# Altium PCB PCB1.PcbDoc (part 2 of 3)
Units mm, origin at the board's own origin, x right, y up, seen from the top; angles counter-clockwise.
Board outline 100.25 x 100.25 mm, 2 copper layers (Top Layer, Bottom Layer); 97 components, 80 nets, 311 pads, 309 vias.
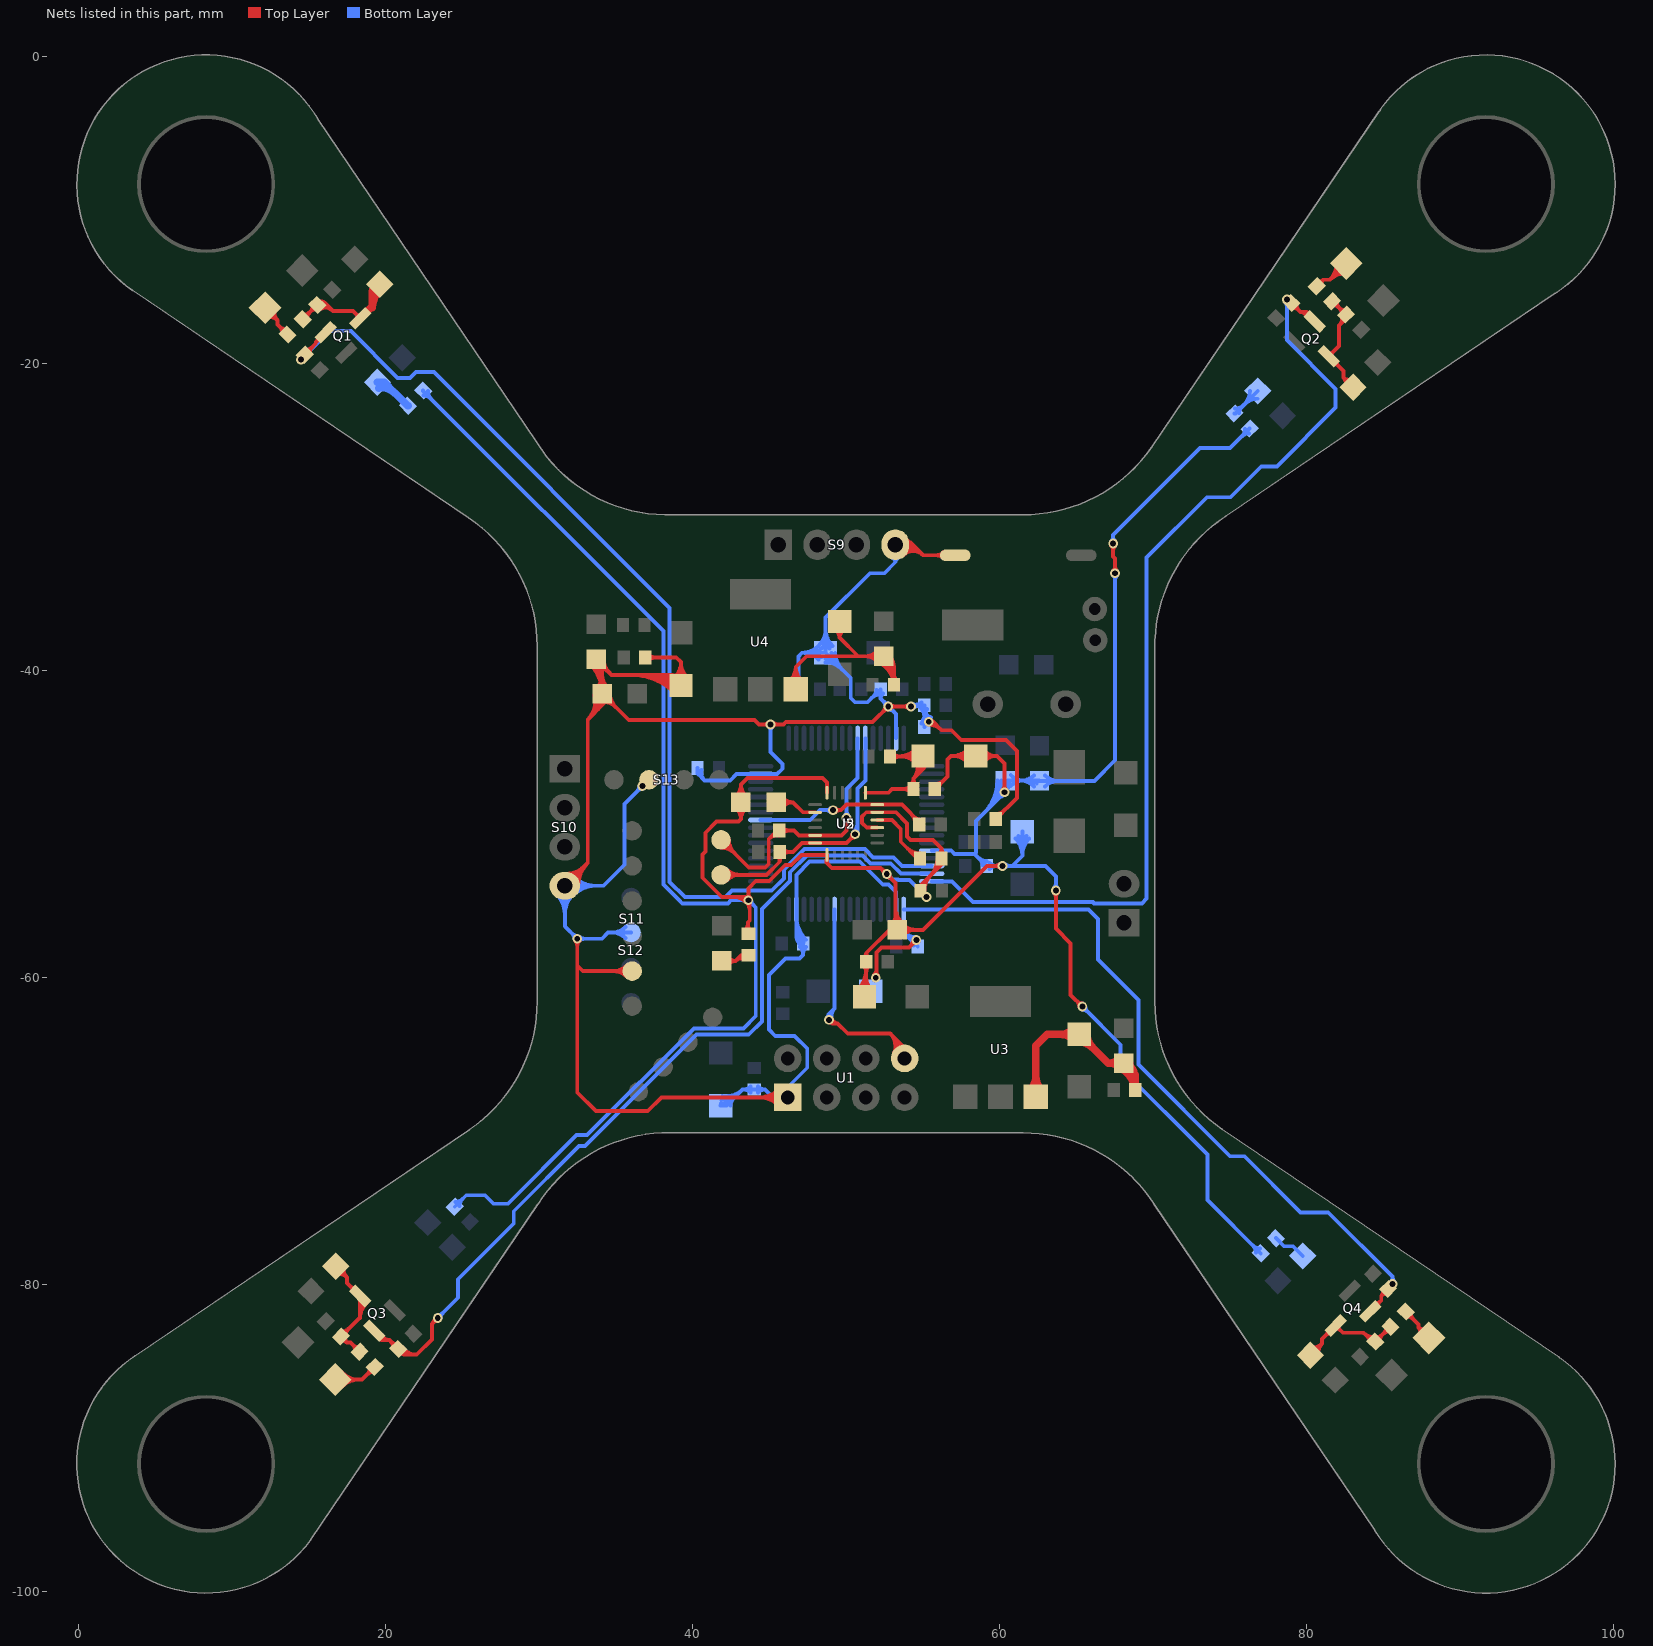
[diagram p2: the nets of this part, all layers, seen from the top]

## Via types
v1: diameter 0.635, hole 0.381, Top Layer to Bottom Layer, 309 vias

## Nets (pads, with @x,y where several pads share a name; then routed paths per layer and width w, separated by ;. In a path a pad name is that pad's centre, name@x,y a point inside that pad or via, vN(x,y) a via of type N, cw(c..) or ccw(c..) an arc to the next point about the centre after c; other vN are vias at no path point) (continued)
GNDA: C6.2 C7.1 C8.2 C9.2 C11.2 C18.1 C20.1 C21.1 EC2.2 EC4.2 EC9.2 L2.2 R1.2 R2.2 R3.2 R4.2 R5.2 U2.1 U2.9 U2.11 U2.18 U5.12 | length 302.8
  Top Layer w0.254: 42.687,-54.762 cw(c42.687,-55.916) 43.502,-55.1 cw(c42.963,-55.64) 43.726,-55.64 ; C8.2@42.808,-48.219 ccw(c42.065,-47.422) 43.155,-47.422 ; C8.2@42.827,-48.979 cw(c42.235,-49.682) 43.155,-49.682 ; 43.3,-54.762 cw(c43.3,-55.303) v1@43.682,-54.921 ; R1.2@43.394,-56.968 ccw(c42.869,-56.443) 43.612,-56.443 ; C8.2@43.482,-48.979 ccw(c44.075,-49.682) 43.155,-49.682 ; C8.2@43.501,-48.219 cw(c44.244,-47.422) 43.155,-47.422 ; v1@43.502,-54.831 ccw(c43.177,-54.506) 43.637,-54.506 ccw(c44.097,-54.506) v1@43.772,-54.831 ; 43.612,-56.562 ccw(c44.187,-56.562) R1.2@43.78,-56.968 ; R1.2@43.637,-57.161 43.612,-57.136 43.612,-56.413 43.726,-56.299 43.726,-55.054 v1(43.637,-54.966) ; U2.1@48.736,-52.362 ccw(c49.117,-52.362) 48.847,-52.632 ; U2.1@48.74,-52.348 ccw(c48.877,-52.433) 48.763,-52.547 ; U2.18@48.763,-47.962 48.763,-47.289 48.463,-46.99 43.586,-46.99 43.155,-47.422 ; EC4.2@50.757,-60.816 ccw(c49.401,-59.459) 51.319,-59.459 ; EC4.2@50.937,-60.995 ccw(c50.014,-60.073) 51.319,-60.073 ; C11.2@51.126,-59.222 cw(c50.66,-59.688) 51.319,-59.688 cw(c51.978,-59.688) C11.2@51.512,-59.222 ; C11.2@51.164,-58.704 ccw(c50.961,-58.409) 51.319,-58.409 ; EC4.2@51.206,-61.265 51.319,-61.152 C11.2@51.319,-58.979 51.319,-58.409 ; 51.319,-60.004 ccw(c52.467,-60.004) EC4.2@51.655,-60.816 ; C11.2@51.474,-58.704 cw(c51.678,-58.409) 51.319,-58.409 ; U2.9@52.038,-50.237 51.355,-50.237 51.054,-49.936 51.054,-49.505 51.321,-49.237 U2.11@52.038,-49.237 53.25,-49.237 53.975,-49.962 53.975,-50.825 54.204,-51.054 55.677,-51.054 56.224,-51.602 ; v1@52.464,-53.264 ccw(c52.004,-53.264) 52.329,-52.939 ccw(c52.654,-52.613) v1@52.654,-53.073 ; v1@52.654,-53.454 cw(c52.654,-53.914) 52.979,-53.589 cw(c53.305,-53.264) v1@52.845,-53.264 ; L2.2@52.981,-56.537 ccw(c52.393,-55.949) 53.224,-55.949 ; 53.224,-56.003 ccw(c54.233,-56.003) L2.2@53.52,-56.716 ; 53.224,-55.39 ccw(c54.846,-55.39) 53.699,-56.537 ccw(c54.566,-55.67) 54.566,-56.896 ccw(c54.566,-58.122) L2.2@53.699,-57.255 ; C6.2@54.85,-54.356 54.85,-54.015 56.224,-52.64 C9.2@56.224,-52.248 56.224,-51.602 ; C6.2@54.869,-54.306 cw(c55.618,-54.306) 55.088,-53.776 ; C6.2@55.123,-54.306 cw(c56.485,-54.306) 55.522,-53.343 ; 55.516,-53.348 ccw(c54.466,-52.298) C9.2@55.951,-52.298 ; C7.1@55.793,-47.727 56.617,-46.903 56.617,-45.796 56.845,-45.568 EC2.2@58.445,-45.568 59.842,-45.568 ; C7.1@55.793,-47.404 ccw(c55.793,-46.624) 56.344,-47.175 ; 55.95,-52.914 ccw(c55.333,-52.298) C9.2@56.205,-52.298 ; C9.2@56.046,-51.991 ccw(c55.71,-51.602) 56.224,-51.602 ; C7.1@56.066,-47.677 cw(c56.604,-47.677) 56.223,-47.296 ; C9.2@56.403,-51.991 cw(c56.739,-51.602) 56.224,-51.602 ; EC2.2@57.996,-46.017 ccw(c56.912,-47.101) 56.912,-45.568 ccw(c56.912,-44.035) EC2.2@57.996,-45.119 ; EC2.2@58.176,-45.837 ccw(c57.526,-46.487) 57.526,-45.568 ccw(c57.526,-44.648) EC2.2@58.176,-45.298 ; EC2.2@58.732,-45.818 cw(c59.284,-46.299) 59.284,-45.568 cw(c59.284,-44.836) EC2.2@58.732,-45.317 ; EC2.2@58.924,-45.985 cw(c59.842,-46.787) 59.842,-45.568 ; EC2.2@58.924,-45.15 ccw(c59.842,-44.349) 59.842,-45.568 ; v1@60.063,-52.865 ccw(c59.738,-53.19) 59.738,-52.73 ccw(c59.738,-52.27) v1@60.063,-52.596 ; v1@60.19,-47.795 ccw(c59.865,-47.47) 60.325,-47.47 ccw(c60.785,-47.47) v1@60.46,-47.795 ; v1(60.198,-52.73) 59.182,-52.73 55.016,-56.896 L2.2@53.34,-56.896 L2.2@53.224,-56.896 ; v1(60.325,-47.93) 60.325,-46.05 59.842,-45.568 ; v1@63.543,-54.465 cw(c63.218,-54.791) 63.678,-54.791 cw(c64.138,-54.791) v1@63.813,-54.465 ; v1(63.678,-54.331) 63.678,-56.82 64.643,-57.785 64.643,-61.138 v1(65.405,-61.9) ; v1@65.215,-61.9 ccw(c64.755,-61.9) 65.08,-61.575 ccw(c65.405,-61.249) v1@65.405,-61.709 ; v1@67.277,-31.859 cw(c66.952,-32.185) 67.412,-32.185 cw(c67.872,-32.185) v1@67.546,-31.859 ; v1@67.404,-33.52 ccw(c67.079,-33.195) 67.539,-33.195 ccw(c67.999,-33.195) v1@67.673,-33.52 ; v1(67.412,-31.725) 67.412,-32.563 67.539,-32.69 v1(67.539,-33.655) ; 43.155,-49.682 42.989,-49.847 41.567,-49.847 40.843,-50.571 40.843,-51.791 40.64,-51.994 40.64,-53.502 41.901,-54.762 43.434,-54.762 v1(43.637,-54.966) ; 43.155,-49.682 C8.2@43.155,-48.59 43.155,-47.422 ; v1(43.637,-54.966) 43.637,-54.204 44.12,-53.721 44.999,-53.721 46.041,-52.68 46.431,-52.68 47.099,-52.012 U2.1@48.763,-52.012 48.763,-52.547 ; 48.763,-52.547 49.073,-52.857 52.248,-52.857 v1(52.654,-53.264) 53.224,-53.834 L2.2@53.224,-56.896 ; 51.319,-58.409 52.832,-56.896 L2.2@53.224,-56.896
  Bottom Layer w0.254: R2.2@22.441,-21.755 22.441,-21.773 38.1,-37.433 38.1,-53.95 39.116,-54.966 39.125,-54.966 39.329,-55.169 42.307,-55.169 42.51,-54.966 v1(43.637,-54.966) 44.12,-55.448 44.12,-62.509 43.307,-63.322 40.091,-63.322 33.131,-70.282 32.436,-70.282 27.965,-74.752 27.026,-74.752 26.467,-74.193 25.249,-74.193 R5.2@24.499,-74.943 ; R2.2@22.476,-22.064 cw(c22.476,-22.679) 22.911,-22.244 ; R2.2@22.749,-21.791 ccw(c23.452,-21.791) 22.955,-22.288 ; R5.2@24.535,-74.634 ccw(c24.535,-73.975) 25.001,-74.441 ccw(c25.467,-74.907) R5.2@24.808,-74.907 ; v1@43.502,-55.1 ccw(c43.177,-55.426) 43.177,-54.966 ccw(c43.177,-54.506) v1@43.502,-54.831 ; v1@43.637,-55.156 cw(c43.637,-55.616) 43.962,-55.291 cw(c44.288,-54.966) v1@43.828,-54.966 ; v1@52.654,-53.454 cw(c52.654,-53.953) 53.007,-53.6 ; v1(52.654,-53.264) 52.67,-53.264 53.026,-53.619 53.384,-53.619 53.409,-53.644 54.126,-53.644 v1(55.245,-54.762) ; v1@52.845,-53.264 ccw(c53.266,-53.264) 52.968,-53.562 ; v1@55.054,-54.762 ccw(c54.595,-54.762) 54.92,-54.437 ccw(c55.245,-54.112) v1@55.245,-54.572 ; U5.12@55.588,-51.737 56.859,-51.737 57.064,-51.943 58.383,-51.943 ; 58.619,-52.179 ccw(c59.171,-51.628) C18.1@59.171,-52.407 ; 58.74,-52.3 cw(c58.359,-52.68) C18.1@58.898,-52.68 ; 58.988,-49.292 ccw(c56.863,-47.168) C20.1@59.868,-47.168 ; C18.1@59.364,-52.923 cw(c59.83,-53.389) 59.83,-52.73 cw(c59.83,-52.071) C18.1@59.364,-52.537 ; 59.421,-48.859 ccw(c57.73,-47.168) C20.1@60.122,-47.168 ; 59.786,-48.314 cw(c60.538,-48.668) v1@60.307,-47.869 ; 59.847,-48.437 cw(c60.487,-48.892) v1@60.357,-48.118 ; 59.855,-48.425 ccw(c58.597,-47.168) C20.1@60.376,-47.168 ; 59.982,-48.298 ccw(c59.613,-47.93) v1@60.134,-47.93 ; 60.025,-47.805 cw(c60.331,-47.949) C20.1@60.237,-47.625 ; 60.043,-48.237 cw(c60.325,-48.519) v1@60.325,-48.12 ; v1@60.063,-52.865 ccw(c59.738,-53.19) 59.738,-52.73 ccw(c59.738,-52.27) v1@60.063,-52.596 ; C20.1@60.19,-47.795 ccw(c59.742,-47.347) C20.1@60.376,-47.347 ; C20.1@60.195,-47.643 cw(c60.096,-47.904) v1@60.376,-47.904 ; C20.1@60.276,-47.746 ccw(c60.157,-47.304) C20.1@60.554,-47.533 ; v1@60.289,-47.992 ccw(c59.465,-47.168) C20.1@60.63,-47.168 ; C20.1@60.32,-47.411 ccw(c60.683,-47.495) C20.1@60.446,-47.783 ; v1@60.333,-52.865 cw(c60.658,-53.19) 60.658,-52.73 cw(c60.658,-52.27) v1@60.333,-52.596 ; C20.1@60.376,-47.593 ccw(c60.662,-47.593) C20.1@60.46,-47.795 ; v1@60.509,-47.88 cw(c60.955,-47.761) C20.1@60.555,-47.53 ; C20.1@60.556,-47.643 ccw(c60.656,-47.904) v1@60.376,-47.904 ; C20.1@60.735,-47.527 cw(c61.602,-48.394) 61.602,-47.168 cw(c61.602,-45.941) C20.1@60.735,-46.809 ; EC9.2@61.044,-50.944 cw(c59.96,-52.028) 61.493,-52.028 cw(c63.026,-52.028) EC9.2@61.942,-50.944 ; EC9.2@61.224,-50.765 cw(c60.574,-51.415) 61.493,-51.415 cw(c62.413,-51.415) EC9.2@61.763,-50.765 ; 61.323,-47.168 cw(c61.323,-48.481) C21.1@62.252,-47.552 ; 61.446,-47.168 ccw(c61.446,-46.028) C21.1@62.252,-46.834 ; EC9.2@61.493,-50.495 61.493,-52.07 60.833,-52.73 ; 61.936,-47.168 cw(c61.936,-47.868) C21.1@62.431,-47.373 ; C21.1@62.97,-47.552 cw(c63.837,-48.42) 63.837,-47.193 cw(c63.837,-45.967) C21.1@62.97,-46.834 ; v1@63.543,-54.196 ccw(c63.218,-53.871) 63.678,-53.871 ccw(c64.138,-53.871) v1@63.813,-54.196 ; v1(63.678,-54.331) 63.678,-53.416 62.992,-52.73 60.833,-52.73 ; v1@65.405,-62.09 cw(c65.405,-62.55) 65.73,-62.225 cw(c66.055,-61.9) v1@65.596,-61.9 ; v1(65.405,-61.9) 67.894,-64.389 67.894,-65.888 73.558,-71.552 73.558,-74.511 R4.2@77.029,-77.982 ; v1@67.277,-31.59 ccw(c66.952,-31.265) 67.412,-31.265 ccw(c67.872,-31.265) v1@67.546,-31.59 ; v1@67.404,-33.79 cw(c67.079,-34.115) 67.539,-34.115 cw(c67.999,-34.115) v1@67.673,-33.79 ; v1(67.412,-31.725) 67.412,-31.166 73.076,-25.502 75.035,-25.502 R3.2@76.308,-24.229 ; v1(67.539,-33.655) 67.539,-45.847 66.192,-47.193 C21.1@62.611,-47.193 62.586,-47.168 C20.1@60.376,-47.168 ; R3.2@75.999,-24.264 cw(c75.34,-24.264) 75.806,-24.73 cw(c76.272,-25.196) R3.2@76.272,-24.537 ; R4.2@76.721,-77.946 ccw(c76.062,-77.946) 76.528,-77.48 ccw(c76.994,-77.014) R4.2@76.994,-77.673 ; 58.383,-51.943 C18.1@59.171,-52.73 60.833,-52.73 ; 58.383,-51.943 58.466,-51.86 58.466,-49.814 v1@60.376,-47.904 ; v1@60.376,-47.904 C20.1@60.376,-47.168
GNDD: C1.1 C13.2 C14.1 C15.1 C16.1 C17.1 C19.1 C22.2 EC1.2 EC6.2 EC7.2 EC8.2 L4.2 LED6.2 R20.2 R23.1 S9.4 S10.4 S11.5 S12.3 S13.3 SW1.2 U1.1 U5.18 U5.31 U5.47 U5.63 | length 297.4
  Top Layer w0.254: S10.4@31.674,-54.026 33.172,-52.527 33.172,-43.18 ; S10.4@31.774,-53.507 ccw(c31.774,-52.495) 32.489,-53.211 ; S10.4@31.774,-53.253 ccw(c31.774,-51.628) 32.923,-52.777 ; S10.4@32.293,-54.026 cw(c33.787,-54.026) 32.73,-52.969 ; v1@32.352,-57.615 cw(c32.027,-57.94) 32.487,-57.94 cw(c32.947,-57.94) v1@32.621,-57.615 ; v1(32.487,-57.48) 32.487,-59.233 ; S10.4@32.547,-54.026 cw(c34.654,-54.026) 33.164,-52.535 ; LED6.2@33.349,-39.628 cw(c31.5,-41.476) L4.2@34.114,-41.476 ; 33.496,-42.856 ccw(c32.515,-41.875) L4.2@33.867,-41.561 ; LED6.2@33.528,-39.448 cw(c32.113,-40.863) 34.114,-40.863 ; L4.2@33.619,-41.619 cw(c31.989,-41.997) 33.172,-43.18 ; LED6.2@33.708,-39.777 cw(c33.708,-41.003) 34.575,-40.136 cw(c35.442,-39.269) LED6.2@34.216,-39.269 ; LED6.2@33.708,-39.269 cw(c32.727,-40.25) 34.114,-40.25 ; L4.2@33.755,-41.145 ccw(c32.888,-40.277) 34.114,-40.277 ccw(c35.341,-40.277) L4.2@34.473,-41.145 ; 33.82,-42.533 ccw(c33.04,-41.753) L4.2@34.114,-41.504 ; L4.2@33.935,-41.979 cw(c33.837,-42.238) 34.114,-42.238 ; L4.2@34.114,-42.012 cw(c34.114,-43.238) 34.981,-42.371 cw(c35.849,-41.504) L4.2@34.622,-41.504 ; 34.143,-42.209 ccw(c33.565,-41.631) L4.2@34.362,-41.446 ; L4.2@34.293,-41.979 ccw(c34.391,-42.238) 34.114,-42.238 ; S11.5@35.709,-59.948 ccw(c34.842,-60.815) 34.842,-59.588 ccw(c34.842,-58.362) S11.5@35.709,-59.229 ; 36.056,-40.284 cw(c36.056,-44.16) EC6.2@38.796,-41.419 ; S11.5@36.068,-59.588 32.842,-59.588 32.487,-59.233 ; 36.669,-40.284 cw(c36.669,-43.546) EC6.2@38.976,-41.24 ; C13.2@36.922,-39.142 38.938,-39.142 39.245,-39.448 ; C13.2@37.115,-39.335 cw(c37.581,-39.801) 37.581,-39.142 cw(c37.581,-38.483) C13.2@37.115,-38.949 ; 37.282,-40.284 cw(c37.282,-42.933) EC6.2@39.155,-41.06 ; 37.895,-40.284 cw(c37.895,-42.32) EC6.2@39.335,-40.881 ; EC6.2@38.509,-40.284 cw(c38.509,-41.707) EC6.2@39.514,-40.701 ; EC6.2@38.798,-40.519 ccw(c37.738,-39.448) 39.245,-39.448 ; EC6.2@38.977,-40.7 ccw(c38.341,-40.057) 39.245,-40.057 ccw(c40.149,-40.057) EC6.2@39.513,-40.7 ; EC6.2@39.692,-40.519 cw(c40.752,-39.448) 39.245,-39.448 ; v1@44.95,-43.645 ccw(c44.625,-43.97) 44.625,-43.51 ccw(c44.625,-43.05) v1@44.95,-43.375 ; v1@45.22,-43.645 cw(c45.545,-43.97) 45.545,-43.51 cw(c45.545,-43.05) v1@45.22,-43.375 ; U1.1@45.656,-68.365 ccw(c44.336,-69.684) 44.336,-67.818 ccw(c44.336,-65.952) U1.1@45.656,-67.271 ; U1.1@45.836,-68.185 ccw(c44.95,-69.071) 44.95,-67.818 ccw(c44.95,-66.565) U1.1@45.836,-67.451 ; U1.1@46.203,-67.818 37.973,-67.818 37.08,-68.711 33.71,-68.711 32.487,-67.488 32.487,-59.233 ; v1@51.808,-59.885 ccw(c51.349,-59.426) 51.999,-59.426 ; v1(51.943,-60.02) 51.999,-59.965 51.999,-58.364 52.324,-58.039 54.102,-58.039 v1(54.585,-57.556) ; 51.999,-59.695 ccw(c52.269,-59.695) v1@52.078,-59.885 ; v1@52.565,-42.342 cw(c52.105,-42.342) 52.431,-42.667 cw(c52.756,-42.992) v1@52.756,-42.532 ; v1@52.891,-42.477 cw(c53.216,-42.802) 53.216,-42.342 cw(c53.216,-41.882) v1@52.891,-42.207 ; S9.4@53.047,-31.723 cw(c53.662,-32.381) 54.299,-31.744 ; S9.4@53.213,-31.648 54.204,-31.648 ; S9.4@53.221,-31.909 cw(c53.842,-32.573) 54.485,-31.93 ; S9.4@53.394,-32.094 cw(c54.021,-32.764) 54.671,-32.115 ; S9.4@53.568,-32.28 cw(c54.201,-32.956) 54.856,-32.301 ; S9.4@53.741,-32.465 cw(c54.38,-33.148) 55.042,-32.487 ; S9.4@53.948,-31.463 ccw(c54.204,-31.38) 54.204,-31.648 ; S9.4@53.973,-31.84 cw(c54.204,-31.882) 54.204,-31.648 ; v1@54.094,-42.477 ccw(c53.769,-42.802) 53.769,-42.342 ccw(c53.769,-41.882) v1@54.094,-42.207 ; v1(54.229,-42.342) v1(52.756,-42.342) 51.74,-43.358 46.076,-43.358 45.923,-43.51 v1(45.085,-43.51) 44.323,-43.51 44.044,-43.231 35.841,-43.231 L4.2@34.114,-41.504 ; v1@54.394,-57.556 cw(c53.934,-57.556) 54.259,-57.882 cw(c54.585,-58.207) v1@54.585,-57.747 ; v1@55.397,-43.523 cw(c55.397,-44.657) 56.2,-43.855 ; v1(55.397,-43.332) 55.677,-43.332 56.232,-43.887 56.871,-43.887 57.51,-44.526 60.427,-44.526 61.138,-45.237 61.138,-48.3 C22.2@59.755,-49.682 ; v1@55.397,-43.269 cw(c55.397,-43.79) 55.766,-43.422 ; SW1.2@56.324,-32.662 ccw(c55.901,-33.085) 55.901,-32.487 ccw(c55.901,-31.888) SW1.2@56.324,-32.311 ; SW1.2@57.125,-32.487 55.042,-32.487 ; C22.2@59.755,-49.359 ccw(c59.755,-48.58) 60.306,-49.131 ; C22.2@60.028,-49.632 cw(c60.566,-49.632) 60.186,-49.252 ; 33.172,-43.18 34.114,-42.238 ; 34.114,-42.238 L4.2@34.114,-41.504 ; L4.2@34.114,-41.504 34.114,-39.675 34.724,-40.284 38.559,-40.284 EC6.2@39.245,-40.97 39.245,-39.448 ; 54.204,-31.648 55.042,-32.487
  Bottom Layer w0.254: S10.4@31.127,-54.572 cw(c29.808,-55.892) 31.674,-55.892 cw(c33.54,-55.892) S10.4@32.22,-54.572 ; S10.4@31.307,-54.393 cw(c30.421,-55.279) 31.674,-55.279 cw(c32.927,-55.279) S10.4@32.041,-54.393 ; S10.4@32.141,-54.393 cw(c33.027,-55.279) 33.027,-54.026 cw(c33.027,-52.773) S10.4@32.141,-53.659 ; v1@32.296,-57.48 ccw(c31.836,-57.48) 32.161,-57.155 ccw(c32.487,-56.83) v1@32.487,-57.29 ; S10.4@32.32,-54.572 cw(c33.64,-55.892) 33.64,-54.026 cw(c33.64,-52.16) S10.4@32.32,-53.479 ; v1@32.621,-57.615 cw(c32.947,-57.94) 32.947,-57.48 cw(c32.947,-57.02) v1@32.621,-57.345 ; S12.3@35.633,-57.433 ccw(c34.765,-58.3) 34.765,-57.074 ccw(c34.765,-55.847) S12.3@35.633,-56.715 ; S12.3@35.992,-57.074 34.493,-57.074 34.087,-57.48 v1(32.487,-57.48) 31.674,-56.667 S10.4@31.674,-54.026 34.188,-54.026 35.56,-52.654 35.56,-48.692 v1(36.728,-47.523) ; v1@36.538,-47.523 cw(c36.078,-47.523) 36.403,-47.849 cw(c36.728,-48.174) v1@36.728,-47.714 ; C15.1@40.321,-46.355 40.321,-46.696 40.399,-46.774 40.405,-46.774 40.754,-47.124 ; C15.1@40.339,-46.41 ccw(c40.741,-46.521) 40.446,-46.816 ; C15.1@40.584,-46.478 ccw(c41.223,-46.655) 40.754,-47.124 ; EC1.2@41.834,-68.351 42.215,-68.351 43.267,-67.299 ; EC1.2@41.855,-68.226 ccw(c41.989,-67.417) EC1.2@42.569,-67.997 ; EC1.2@41.896,-67.976 ccw(c42.089,-66.819) 42.918,-67.648 ; EC1.2@41.938,-67.725 ccw(c42.189,-66.22) 43.267,-67.299 ; EC1.2@42.469,-68.351 cw(c43.082,-68.351) 42.648,-67.918 ; C1.1@43.775,-67.492 ccw(c43.309,-67.958) 43.309,-67.299 ccw(c43.309,-66.64) C1.1@43.775,-67.106 ; C1.1@44.263,-67.49 cw(c44.718,-67.936) 44.718,-67.299 ; C1.1@44.263,-67.108 ccw(c44.718,-66.662) 44.718,-67.299 ; v1@44.95,-43.645 cw(c44.625,-43.97) 45.085,-43.97 cw(c45.545,-43.97) v1@45.22,-43.645 ; v1(45.085,-43.51) 45.085,-45.314 45.852,-46.08 45.852,-46.401 45.516,-46.737 U5.47@44.438,-46.737 42.874,-46.737 42.456,-47.155 40.78,-47.155 40.754,-47.13 40.754,-47.124 ; U1.1@45.448,-67.987 ccw(c45.237,-68.034) 45.237,-67.818 ; U1.1@45.448,-67.649 cw(c45.237,-67.602) 45.237,-67.818 ; R20.2@46.707,-40.981 ccw(c46.241,-40.515) 46.9,-40.515 ccw(c47.559,-40.515) R20.2@47.093,-40.981 ; 46.763,-57.229 ccw(c47.714,-57.229) C17.1@47.041,-57.901 ; 46.763,-56.615 ccw(c48.327,-56.615) C17.1@47.221,-57.722 ; U5.31@46.763,-56.002 ccw(c48.94,-56.002) C17.1@47.4,-57.542 ; 46.777,-57.354 cw(c46.396,-57.735) C17.1@46.934,-57.735 ; R20.2@46.9,-41.224 46.9,-39.079 47.142,-38.837 ; C17.1@47.014,-58.028 cw(c46.548,-58.494) 47.207,-58.494 cw(c47.866,-58.494) C17.1@47.4,-58.028 ; C17.1@47.16,-57.466 cw(c47.083,-57.02) 46.763,-57.34 ; EC7.2@48.215,-39.284 ccw(c47.142,-40.348) 47.142,-38.837 ; EC7.2@48.215,-38.389 cw(c47.142,-37.326) 47.142,-38.837 ; EC7.2@48.217,-38.388 ccw(c47.133,-37.304) 48.666,-37.304 ccw(c50.199,-37.304) EC7.2@49.115,-38.388 ; EC7.2@48.396,-39.105 ccw(c47.752,-39.743) 47.752,-38.837 ccw(c47.752,-37.93) EC7.2@48.396,-38.568 ; EC7.2@48.397,-38.567 ccw(c47.747,-37.917) 48.666,-37.917 ccw(c49.586,-37.917) EC7.2@48.936,-38.567 ; EC7.2@48.666,-39.472 cw(c48.666,-41.005) 49.75,-39.921 cw(c50.834,-38.837) EC7.2@49.301,-38.837 ; EC7.2@48.666,-39.218 cw(c48.666,-40.137) 49.317,-39.487 cw(c49.967,-38.837) EC7.2@49.047,-38.837 ; 51.67,-41.791 cw(c52.259,-42.38) C14.1@52.259,-41.547 ; 51.844,-41.618 ccw(c51.5,-41.274) C14.1@51.986,-41.274 ; C14.1@52.095,-41.493 cw(c51.851,-41.82) 52.259,-41.82 ; 52.413,-41.973 cw(c52.044,-42.342) v1@52.565,-42.342 ; C14.1@52.423,-41.493 ccw(c52.667,-41.82) 52.259,-41.82 ; 52.474,-42.035 ccw(c52.756,-41.753) v1@52.756,-42.151 ; v1@52.756,-42.532 cw(c52.756,-43.054) 53.124,-42.685 ; v1@52.946,-42.342 ccw(c53.345,-42.342) 53.063,-42.624 ; S9.4@52.988,-32.64 cw(c52.896,-32.944) 53.213,-32.944 ; S9.4@53.213,-31.648 53.213,-32.944 ; U5.63@53.263,-44.412 53.263,-42.823 52.259,-41.82 ; S9.4@53.438,-32.64 ccw(c53.53,-32.944) 53.213,-32.944 ; 53.677,-56.99 ccw(c54.585,-56.082) v1@54.585,-57.366 ; 54.11,-57.423 ccw(c54.585,-56.949) C16.1@54.585,-57.62 ; 54.124,-57.437 ccw(c54.675,-56.885) C16.1@54.675,-57.665 ; v1(54.229,-42.342) 54.305,-42.266 R23.1@55.104,-42.266 ; 54.244,-57.558 cw(c53.864,-57.938) C16.1@54.402,-57.938 ; v1@54.324,-42.177 ccw(c54.524,-41.831) 54.627,-42.217 ; v1@54.364,-42.477 cw(c54.873,-42.986) R23.1@54.873,-42.266 ; v1@54.394,-42.437 cw(c54.845,-42.697) R23.1@54.71,-42.195 ; C16.1@54.675,-57.988 53.263,-56.576 U5.18@53.263,-55.562 53.263,-54.431 52.781,-53.95 52.394,-53.95 50.896,-52.451 47.625,-52.451 46.763,-53.313 U5.31@46.763,-55.562 46.763,-57.34 ; C19.1@54.906,-43.453 cw(c55.258,-43.634) C19.1@55.424,-43.275 ; C19.1@54.911,-43.445 ccw(c54.445,-42.979) 55.104,-42.979 ccw(c55.763,-42.979) C19.1@55.297,-43.445 ; R23.1@54.911,-42.509 cw(c54.445,-42.975) 55.104,-42.975 cw(c55.763,-42.975) R23.1@55.297,-42.509 ; R23.1@54.911,-42.459 ccw(c54.445,-42.925) 54.445,-42.266 ccw(c54.445,-41.607) R23.1@54.911,-42.073 ; 55.027,-43.218 cw(c55.369,-43.393) 55.53,-43.044 ; C19.1@55.104,-43.688 R23.1@55.104,-42.266 ; 55.104,-42.825 ccw(c55.841,-42.825) C19.1@55.356,-43.38 ; v1@55.523,-43.189 cw(c56.331,-42.266) R23.1@55.104,-42.266 ; 43.267,-67.299 C1.1@44.018,-67.299 44.718,-67.299 ; 44.718,-67.299 45.237,-67.818 ; 45.237,-67.818 U1.1@46.203,-67.818 46.203,-67.158 47.473,-65.888 47.473,-64.643 46.634,-63.805 45.39,-63.805 44.983,-63.398 44.983,-59.842 46.05,-58.776 46.965,-58.776 47.207,-58.533 C17.1@47.207,-57.785 46.763,-57.34 ; 47.142,-38.837 EC7.2@48.666,-38.837 ; EC7.2@48.666,-38.837 50.313,-40.483 50.313,-41.79 50.585,-42.062 51.399,-42.062 52.237,-41.224 C14.1@52.259,-41.224 52.259,-41.82 ; EC7.2@48.666,-38.837 48.666,-36.551 51.562,-33.655 52.502,-33.655 53.213,-32.944
I2C_SCL: R11.1 S4.1 U2.23 U5.58 | length 22.6
  Top Layer w0.254: S4.1@41.859,-51.537 cw(c41.859,-52.763) 42.726,-51.896 cw(c43.594,-51.029) S4.1@42.367,-51.029 ; S4.1@41.859,-51.029 43.663,-52.832 44.739,-52.832 44.963,-52.608 44.963,-50.973 ; R11.1@45.628,-50.74 ccw(c45.537,-51.547) 44.963,-50.973 ; R11.1@45.851,-50.612 cw(c46.317,-51.078) 46.317,-50.419 cw(c46.317,-49.76) R11.1@45.851,-50.226 ; v1@49.903,-49.741 cw(c49.578,-50.066) 50.038,-50.066 cw(c50.498,-50.066) v1@50.173,-49.741 ; v1(50.038,-49.606) 50.038,-50.419 49.72,-50.737 U2.23@47.988,-50.737 46.927,-50.737 46.609,-50.419 R11.1@45.658,-50.419 45.517,-50.419 44.963,-50.973
  Bottom Layer w0.254: v1@49.903,-49.471 ccw(c49.578,-49.146) 50.038,-49.146 ccw(c50.498,-49.146) v1@50.173,-49.471 ; v1(50.038,-49.606) 50.038,-47.727 50.763,-47.002 U5.58@50.763,-44.412
I2C_SDA: R10.1 S4.2 U2.24 U5.59 | length 22.1
  Top Layer w0.254: S4.2@41.859,-53.315 44.831,-53.315 45.683,-52.462 ; S4.2@42.218,-53.674 cw(c43.086,-54.541) 43.086,-53.315 cw(c43.086,-52.088) S4.2@42.218,-52.955 ; R10.1@45.505,-52.073 cw(c45.169,-52.462) 45.683,-52.462 ; R10.1@45.862,-52.073 ccw(c46.198,-52.462) 45.683,-52.462 ; R10.1@45.876,-52.009 cw(c46.342,-52.475) 46.342,-51.816 cw(c46.342,-51.157) R10.1@45.876,-51.623 ; v1@50.406,-50.673 cw(c49.946,-50.673) 50.272,-50.998 cw(c50.597,-51.323) v1@50.597,-50.864 ; v1(50.597,-50.673) 50.033,-51.237 U2.24@47.988,-51.237 47.137,-51.237 46.558,-51.816 R10.1@45.683,-51.816 45.683,-52.462
  Bottom Layer w0.254: v1@50.462,-50.538 ccw(c49.769,-49.845) 50.749,-49.845 ; v1(50.597,-50.673) 50.749,-50.521 50.749,-47.676 51.263,-47.162 U5.59@51.263,-44.412
INT1: R12.1 U2.12 U5.41 | length 14
  Top Layer w0.254: v1@49.073,-49.098 v1(49.149,-49.098) 49.682,-49.098 50.043,-48.737 U2.12@52.038,-48.737 53.655,-48.737 54.774,-49.855 R12.1@54.774,-50.038 ; v1@49.284,-49.233 cw(c49.609,-49.558) 49.609,-49.098 cw(c49.609,-48.638) v1@49.284,-48.963 ; 54.214,-49.296 cw(c53.522,-49.988) R12.1@54.501,-49.988 ; R12.1@54.534,-49.616 ccw(c54.774,-49.376) R12.1@54.774,-49.715
  Bottom Layer w0.254: U5.41@44.438,-49.737 47.672,-49.737 48.311,-49.098 v1(49.149,-49.098) ; v1@49.014,-49.233 ccw(c48.689,-49.558) 48.689,-49.098 ccw(c48.689,-48.638) v1@49.014,-48.963
IRQ: U1.8 U5.26 | length 20
  Top Layer w0.254: v1(48.895,-62.763) 49.124,-62.992 ; v1@48.948,-62.947 cw(c48.997,-63.119) 49.124,-62.992 ; v1@49.078,-62.816 ccw(c49.25,-62.865) 49.124,-62.992 ; v1@49.078,-62.71 ccw(c49.454,-62.6) 49.454,-62.992 ; U1.8@53.119,-64.958 ccw(c52.06,-64.475) 52.883,-63.652 ; 53.142,-63.911 cw(c52.416,-64.637) U1.8@53.35,-65.063 ; 53.401,-64.17 cw(c52.772,-64.8) U1.8@53.581,-65.168 ; U1.8@53.823,-65.278 53.823,-64.592 52.883,-63.652 ; 49.124,-62.992 49.454,-62.992 ; 49.454,-62.992 50.114,-63.652 52.883,-63.652
  Bottom Layer w0.254: v1@48.8,-62.598 ccw(c48.704,-62.433) 48.895,-62.433 ; v1@48.834,-62.781 cw(c49.272,-62.651) 48.949,-62.328 ; v1(48.895,-62.763) 48.895,-62.433 ; v1@48.99,-62.598 cw(c49.086,-62.433) 48.895,-62.433 ; v1@49.078,-62.709 cw(c49.737,-62.513) 49.251,-62.027 ; U5.26@49.263,-55.562 49.251,-55.574 49.251,-62.027 ; 48.895,-62.433 48.87,-62.408 49.251,-62.027
M0: Q1.2 R8.1 U5.14 | length 75.7
  Top Layer w0.254: R8.1@14.659,-19.676 cw(c14.897,-19.596) R8.1@14.72,-19.419 15.443,-18.695 15.443,-18.595 Q1.2@16.084,-17.955 ; R8.1@14.668,-19.736 cw(c15.311,-19.736) R8.1@14.857,-19.282 ; R8.1@14.755,-19.11 ccw(c14.755,-18.451) 15.221,-18.917 ccw(c15.687,-19.383) R8.1@15.028,-19.383 ; Q1.2@15.593,-18.273 cw(c15.175,-18.273) 15.471,-18.568 cw(c15.766,-18.863) Q1.2@15.766,-18.446 ; R8.1@14.478,-19.545 ccw(c14.478,-19.268) 14.674,-19.464 cw(c14.478,-19.268) R8.1@14.478,-19.545
  Bottom Layer w0.254: v1(14.478,-19.736) 16.332,-17.882 17.729,-17.882 20.777,-20.93 21.59,-20.93 21.971,-20.549 23.139,-20.549 38.506,-35.916 38.506,-53.772 39.497,-54.762 42.139,-54.762 42.57,-54.331 45.161,-54.331 45.95,-53.542 45.95,-52.977 47.288,-51.638 51.232,-51.638 51.766,-52.172 53.086,-52.172 53.652,-52.737 U5.14@55.588,-52.737 ; v1@14.478,-19.545 ccw(c14.478,-19.085) 14.803,-19.411 ccw(c15.128,-19.736) v1@14.668,-19.736
M1: Q3.2 R16.1 U5.15 | length 64.2
  Top Layer w0.254: Q3.2@19.25,-83.027 19.865,-83.642 20.244,-83.642 ; Q3.2@19.492,-83.373 ccw(c19.879,-83.229) 19.879,-83.642 ; Q3.2@19.568,-83.518 cw(c19.568,-83.936) 19.863,-83.64 cw(c20.159,-83.345) Q3.2@19.741,-83.345 ; Q3.2@19.73,-83.285 ccw(c20.244,-83.094) 20.244,-83.642 ; R16.1@20.507,-84.178 ccw(c19.848,-84.178) 20.314,-83.712 ccw(c20.78,-83.246) R16.1@20.78,-83.905 ; R16.1@20.866,-84.238 ccw(c21.531,-83.768) 21.531,-84.582 ; R16.1@20.922,-84.512 cw(c20.993,-84.773) 21.184,-84.582 ; R16.1@21.074,-84.091 ccw(c22.022,-83.421) 22.022,-84.582 ; R16.1@21.114,-84.32 ccw(c21.375,-84.391) 21.184,-84.582 ; v1@23.203,-82.194 cw(c22.743,-82.194) 23.068,-82.52 cw(c23.393,-82.845) v1@23.393,-82.385 ; v1(23.393,-82.194) 23.012,-82.575 23.012,-83.591 22.022,-84.582 ; 20.244,-83.642 R16.1@20.816,-84.213 21.184,-84.582 ; 21.184,-84.582 22.022,-84.582
  Bottom Layer w0.254: v1@23.343,-82.245 24.712,-80.876 24.712,-79.671 28.346,-76.036 28.346,-75.237 32.589,-70.995 32.993,-70.995 40.259,-63.729 43.663,-63.729 44.526,-62.865 44.526,-55.54 46.356,-53.71 46.356,-53.145 47.457,-52.045 51.064,-52.045 51.597,-52.578 52.918,-52.578 53.577,-53.237 U5.15@55.588,-53.237 ; v1@23.393,-82.004 ccw(c23.393,-81.544) 23.719,-81.869 ccw(c24.044,-82.194) v1@23.584,-82.194
M2: Q2.2 R9.1 U5.16 | length 68.5
  Top Layer w0.254: R9.1@78.74,-16.015 cw(c78.74,-16.657) R9.1@79.194,-16.203 ; R9.1@78.816,-15.999 cw(c78.893,-16.179) R9.1@79.032,-16.04 79.628,-16.637 ; R9.1@79.067,-16.349 cw(c79.067,-17.008) 79.533,-16.542 cw(c79.999,-16.076) R9.1@79.34,-16.076 ; 79.952,-16.637 cw(c79.952,-17.002) Q2.2@80.307,-16.915 ; Q2.2@80.055,-16.934 ccw(c79.638,-16.934) 79.933,-16.639 ccw(c80.228,-16.344) Q2.2@80.228,-16.761 ; Q2.2@80.06,-16.976 ccw(c79.628,-17.082) 79.628,-16.637 ; Q2.2@80.547,-17.253 79.931,-16.637 79.628,-16.637 ; R9.1@78.93,-15.824 ccw(c79.208,-15.824) 79.012,-16.02 cw(c79.208,-15.824) R9.1@78.93,-15.824
  Bottom Layer w0.254: U5.16@55.588,-53.737 56.912,-53.737 58.268,-55.093 66.091,-55.093 66.167,-55.169 69.289,-55.169 69.594,-54.864 69.594,-32.641 73.533,-28.702 75.057,-28.702 77.064,-26.695 78.08,-26.695 81.915,-22.86 81.915,-21.641 78.74,-18.466 v1(78.74,-15.824) v1@78.664,-15.748 ; v1@78.605,-15.959 cw(c78.28,-16.284) 78.74,-16.284 cw(c79.2,-16.284) v1@78.875,-15.959
M3: Q4.2 R17.1 U5.17 | length 51.8
  Top Layer w0.254: Q4.2@84.17,-81.766 84.887,-81.049 84.887,-80.746 ; Q4.2@84.488,-81.275 ccw(c84.488,-80.857) 84.783,-81.152 ccw(c85.079,-81.448) Q4.2@84.661,-81.448 ; R17.1@85.024,-80.364 cw(c84.55,-80.41) 84.887,-80.746 ; R17.1@85.269,-80.609 ccw(c85.223,-81.082) 84.887,-80.746 ; R17.1@85.281,-80.352 ccw(c84.913,-79.985) R17.1@85.433,-79.985 ; R17.1@85.434,-80.006 cw(c85.076,-80.047) R17.1@85.331,-80.302 84.887,-80.746 ; R17.1@85.34,-80.292 cw(c85.623,-80.575) 85.623,-80.175 ccw(c85.623,-80.575) R17.1@85.34,-80.292
  Bottom Layer w0.254: U5.17@53.763,-55.562 65.798,-55.562 66.421,-56.185 66.421,-58.826 69.063,-61.468 69.063,-65.684 75.032,-71.653 75.967,-71.653 79.623,-75.309 81.431,-75.309 85.623,-79.502 v1(85.623,-79.985) ; v1@85.489,-79.85 ccw(c85.163,-79.525) 85.623,-79.525 ccw(c86.083,-79.525) v1@85.758,-79.85
NetC2_1: C2.1 Q1.1 R6.1 S2.2 | length 16.4
  Top Layer w0.254: R6.1@14.592,-17.107 C2.1@15.532,-16.167 16.167,-16.167 ; R6.1@14.592,-16.834 ccw(c14.592,-16.175) 15.058,-16.641 ccw(c15.524,-17.107) R6.1@14.865,-17.107 ; C2.1@15.259,-16.167 cw(c14.6,-16.167) 15.066,-16.633 cw(c15.532,-17.099) C2.1@15.532,-16.44 ; C2.1@15.453,-15.997 cw(c15.711,-16.459) 16.085,-16.085 ; C2.1@15.577,-16.219 cw(c15.881,-16.765) 16.323,-16.323 ; C2.1@15.701,-16.441 cw(c16.051,-17.07) 16.561,-16.561 ; C2.1@15.761,-16.009 ccw(c16.142,-15.628) 16.142,-16.167 ; C2.1@15.79,-16.361 cw(c16.167,-16.63) 16.167,-16.167 ; Q1.1@18.174,-17.035 ccw(c17.756,-17.035) 18.052,-16.74 ccw(c18.347,-16.445) Q1.1@18.347,-16.862 ; Q1.1@18.347,-17.035 17.872,-16.561 16.561,-16.561 ; 16.167,-16.167 16.561,-16.561
  Top Layer w0.5: Q1.1@18.347,-17.035 19.126,-16.256 19.126,-15.297 ; 19.126,-16.333 cw(c20.502,-16.333) S2.2@19.801,-15.15 ; 19.126,-15.456 cw(c19.982,-15.456) S2.2@19.546,-14.72 ; S2.2@19.231,-14.914 cw(c18.843,-15.013) 19.126,-15.297 ; S2.2@19.509,-15.192 ccw(c19.41,-15.58) 19.126,-15.297 ; S2.2@19.604,-14.819 19.126,-15.297
NetC3_1: C3.1 Q2.1 R7.1 S3.2 | length 12.2
  Top Layer w0.254: Q2.1@81.466,-19.342 ccw(c81.466,-18.925) 81.761,-19.22 ccw(c82.057,-19.515) Q2.1@81.639,-19.515 ; R7.1@81.673,-15.938 81.724,-15.938 C3.1@82.588,-16.802 82.588,-17.056 82.144,-17.501 ; R7.1@81.709,-16.176 cw(c81.709,-16.787) 82.141,-16.355 ; Q2.1@81.784,-20.006 cw(c81.784,-20.424) 82.079,-20.129 cw(c82.375,-19.833) Q2.1@81.957,-19.833 ; R7.1@81.982,-15.903 ccw(c82.689,-15.903) 82.189,-16.403 ; C3.1@82.291,-16.916 cw(c81.727,-17.084) 82.144,-17.501 ; C3.1@82.315,-16.802 ccw(c81.656,-16.802) 82.122,-16.336 ccw(c82.588,-15.87) C3.1@82.588,-16.529 ; S3.2@82.557,-21.405 ccw(c82.059,-21.274) 82.423,-20.91 ; S3.2@82.918,-21.043 cw(c82.787,-20.546) 82.423,-20.91 ; S3.2@83.048,-21.535 82.423,-20.91 ; 82.144,-17.501 82.144,-18.838 Q2.1@81.466,-19.515 82.423,-20.472 82.423,-20.91
NetC4_1: C4.1 Q3.1 R14.1 S5.2 | length 14.4
  Top Layer w0.254: S5.2@16.749,-78.821 17.475,-79.547 ; S5.2@16.816,-79.324 cw(c16.921,-80.102) 17.475,-79.547 ; C4.1@17.115,-83.671 cw(c17.17,-84.1) 17.475,-83.795 ; C4.1@17.117,-83.092 ccw(c17.117,-82.433) 17.583,-82.899 ccw(c18.049,-83.365) C4.1@17.39,-83.365 ; S5.2@17.252,-78.888 ccw(c18.03,-78.992) 17.475,-79.547 ; C4.1@17.352,-83.435 ccw(c17.781,-83.489) 17.475,-83.795 ; Q3.1@17.84,-80.446 ccw(c17.422,-80.446) 17.717,-80.15 ccw(c18.013,-79.855) Q3.1@18.013,-80.273 ; R14.1@18.028,-84.392 ccw(c17.369,-84.392) 17.835,-83.926 ccw(c18.301,-83.46) R14.1@18.301,-84.119 ; R14.1@18.301,-84.392 17.704,-83.795 17.475,-83.795 ; 18.331,-82.197 cw(c19.669,-82.197) Q3.1@18.766,-81.21 ; 18.331,-81.621 cw(c19.142,-81.621) Q3.1@18.594,-81.022 ; Q3.1@18.331,-81.044 cw(c18.614,-81.044) Q3.1@18.423,-80.835 ; 17.475,-83.795 C4.1@17.081,-83.401 18.331,-82.151 Q3.1@18.331,-80.764 17.475,-79.908 17.475,-79.547
NetC5_1: C5.1 Q4.1 R15.1 S6.2 | length 12.7
  Top Layer w0.254: S6.2@80.269,-84.622 81.026,-83.865 ; S6.2@80.319,-84.117 ccw(c80.407,-83.246) 81.026,-83.865 ; S6.2@80.774,-84.572 cw(c81.645,-84.484) 81.026,-83.865 ; Q4.1@81.416,-83.003 cw(c80.998,-83.003) 81.293,-83.299 cw(c81.589,-83.594) Q4.1@81.589,-83.176 ; Q4.1@81.907,-82.858 cw(c81.907,-83.276) 82.202,-82.98 cw(c82.498,-82.685) Q4.1@82.08,-82.685 ; C5.1@84.436,-83.424 cw(c84.363,-82.515) 83.718,-83.16 ; C5.1@84.493,-83.458 ccw(c84.493,-82.738) 85.002,-83.247 ; C5.1@84.766,-83.731 cw(c85.364,-83.731) 84.941,-83.309 ; R15.1@85.211,-82.766 cw(c84.552,-82.766) 85.018,-83.232 cw(c85.484,-83.698) R15.1@85.484,-83.039 ; R15.1@85.484,-82.766 84.518,-83.731 C5.1@84.493,-83.731 84.29,-83.731 83.718,-83.16 ; 81.026,-83.865 81.026,-83.566 Q4.1@81.907,-82.685 82.381,-83.16 83.718,-83.16
NetC7_2: C7.2 EC2.1 L5.1 U2.13 | length 19.7
  Top Layer w0.254: U2.13@51.263,-47.962 52.774,-47.962 53.01,-47.727 C7.2@54.393,-47.727 54.393,-47.03 ; L5.1@52.872,-45.593 54.991,-45.593 EC2.1@55.016,-45.568 55.016,-46.406 ; L5.1@53.065,-45.786 cw(c53.531,-46.252) 53.531,-45.593 cw(c53.531,-44.934) L5.1@53.065,-45.4 ; 53.422,-45.593 ccw(c53.422,-43.973) EC2.1@54.567,-45.119 ; 53.545,-45.593 cw(c53.545,-47.039) EC2.1@54.567,-46.017 ; 54.035,-45.593 ccw(c54.035,-44.586) EC2.1@54.747,-45.298 ; 54.158,-45.593 cw(c54.158,-46.426) EC2.1@54.747,-45.837 ; C7.2@54.2,-47.92 ccw(c53.734,-48.386) 53.734,-47.727 ccw(c53.734,-47.068) C7.2@54.2,-47.534 ; C7.2@54.202,-47.481 ccw(c53.762,-47.03) 54.393,-47.03 ; EC2.1@54.493,-45.928 cw(c53.781,-46.418) 54.393,-47.03 ; C7.2@54.583,-47.481 cw(c55.023,-47.03) 54.393,-47.03 ; 54.608,-46.814 ccw(c54.037,-46.242) EC2.1@54.703,-45.784 ; 54.824,-46.598 ccw(c54.292,-46.066) EC2.1@54.912,-45.64 ; EC2.1@54.845,-46.179 cw(c54.781,-46.406) 55.016,-46.406 ; 55.04,-46.382 ccw(c54.548,-45.89) EC2.1@55.121,-45.496 ; EC2.1@55.188,-46.179 ccw(c55.252,-46.406) 55.016,-46.406 ; 54.393,-47.03 55.016,-46.406
NetC8_1: C8.1 U2.20 | length 4.5
  Top Layer w0.254: C8.1@45.441,-48.59 46.558,-48.59 ; C8.1@45.823,-48.924 cw(c46.558,-49.565) 46.558,-48.59 ; C8.1@45.823,-48.256 ccw(c46.558,-47.615) 46.558,-48.59 ; U2.20@47.988,-49.237 47.205,-49.237 46.558,-48.59
NetC9_1: C9.1 U2.10 | length 5.7
  Top Layer w0.254: U2.10@52.038,-49.737 52.988,-49.737 53.569,-50.317 53.569,-51.156 54.661,-52.248 C9.1@54.824,-52.248 ; 53.994,-51.581 ccw(c54.824,-50.75) C9.1@54.824,-51.925 ; C9.1@54.427,-52.014 ccw(c54.824,-51.617) C9.1@54.824,-52.179
NetC10_1: C10.1 EC3.1 L1.2 U3.3 | length 24.4
  Top Layer w0.5: U3.3@61.98,-67.38 ccw(c61.041,-66.442) 62.369,-66.442 ccw(c63.697,-66.442) U3.3@62.758,-67.38 ; U3.3@62.369,-67.769 62.369,-64.453 63.119,-63.703 EC3.1@65.202,-63.703 67.081,-65.583 L1.2@68.097,-65.583 68.848,-66.334 C10.1@68.848,-67.335 ; EC3.1@64.84,-64.065 ccw(c63.966,-64.939) 63.966,-63.703 ccw(c63.966,-62.467) EC3.1@64.84,-63.341 ; EC3.1@65.202,-64.215 cw(c65.202,-65.451) 66.076,-64.577 cw(c66.95,-63.703) EC3.1@65.714,-63.703 ; L1.2@67.825,-65.855 ccw(c67.168,-66.512) 67.168,-65.583 ccw(c67.168,-64.653) L1.2@67.825,-65.311 ; L1.2@67.914,-65.921 cw(c67.065,-67.489) C10.1@68.848,-67.489 ; L1.2@68.097,-65.968 cw(c68.097,-66.897) 68.755,-66.24 cw(c69.412,-65.583) L1.2@68.482,-65.583 ; L1.2@68.152,-65.482 cw(c67.52,-66.65) 68.848,-66.65
NetC12_1: C12.1 EC5.1 L3.2 U4.3 | length 27.2
  Top Layer w0.254: U4.3@46.29,-40.713 ccw(c45.499,-39.776) 46.725,-39.776 ; U4.3@46.454,-40.907 ccw(c45.961,-40.324) 46.725,-40.324 ccw(c47.488,-40.324) U4.3@46.995,-40.907 ; U4.3@46.725,-41.227 46.725,-39.776 ; U4.3@47.159,-40.713 cw(c47.95,-39.776) 46.725,-39.776 ; EC5.1@49.29,-37.369 cw(c49.044,-37.846) 49.581,-37.846 ; EC5.1@49.581,-36.805 49.581,-37.846 ; EC5.1@49.872,-37.369 ccw(c50.117,-37.846) 49.581,-37.846 ; L3.2@52.094,-39.425 ccw(c51.227,-40.292) 51.227,-39.065 ccw(c51.227,-37.839) L3.2@52.094,-38.706 ; L3.2@52.214,-39.513 cw(c51.398,-41.038) C12.1@53.128,-41.038 ; L3.2@52.333,-39.289 cw(c51.625,-40.615) C12.1@53.128,-40.615 ; L3.2@52.551,-39.564 cw(c52.674,-40.194) 53.128,-39.74 ; L3.2@52.573,-38.841 cw(c52.078,-39.767) 53.128,-39.767 ; C12.1@52.935,-40.677 ccw(c52.469,-40.211) 53.128,-40.211 ccw(c53.787,-40.211) C12.1@53.321,-40.677 ; L3.2@52.952,-39.163 ccw(c53.581,-39.286) 53.128,-39.74 ; C12.1@53.128,-40.92 53.128,-39.74 ; 53.128,-40.191 ccw(c51.851,-40.191) L3.2@52.453,-39.065 ; 46.725,-39.776 47.436,-39.065 50.8,-39.065 ; 49.581,-37.846 50.8,-39.065 ; 50.8,-39.065 L3.2@52.453,-39.065 ; L3.2@52.453,-39.065 53.128,-39.74
NetD1_1: D1.1 R6.2 | length 4.8
  Top Layer w0.254: D1.1@12.141,-16.358 12.954,-17.17 ; D1.1@12.282,-16.977 cw(c12.443,-17.681) 12.954,-17.17 ; D1.1@12.76,-16.499 ccw(c13.465,-16.659) 12.954,-17.17 ; R6.2@13.294,-18.062 ccw(c12.635,-18.062) 13.101,-17.596 ccw(c13.567,-17.13) R6.2@13.567,-17.789 ; R6.2@13.602,-18.097 12.954,-17.449 12.954,-17.17
NetD2_1: D2.1 R7.2 | length 7
  Top Layer w0.254: R7.2@80.683,-14.948 81.103,-14.529 ; R7.2@80.759,-14.643 ccw(c80.817,-14.243) 81.103,-14.529 ; R7.2@80.989,-14.873 cw(c81.388,-14.814) 81.103,-14.529 ; D2.1@81.966,-13.469 cw(c80.491,-13.486) 81.534,-14.529 ; D2.1@82.22,-13.466 cw(c81.335,-13.476) 81.961,-14.102 cw(c82.586,-14.728) D2.1@82.596,-13.843 ; D2.1@82.594,-14.097 ccw(c82.577,-15.571) 81.534,-14.529 ; D2.1@82.601,-13.462 81.534,-14.529 ; 81.103,-14.529 81.534,-14.529
NetD3_1: D3.1 R14.2 | length 7.8
  Top Layer w0.254: D3.1@16.713,-86.208 18.465,-86.208 R14.2@19.291,-85.382 ; D3.1@16.983,-86.477 cw(c17.633,-87.127) 17.633,-86.208 cw(c17.633,-85.288) D3.1@16.983,-85.938 ; D3.1@17.162,-86.657 cw(c18.246,-87.741) 18.246,-86.208 cw(c18.246,-84.675) D3.1@17.162,-85.759 ; R14.2@18.983,-85.417 cw(c18.324,-85.417) 18.79,-85.883 cw(c19.256,-86.349) R14.2@19.256,-85.69
NetD4_1: D4.1 R15.2 | length 4.3
  Top Layer w0.254: R15.2@86.474,-81.776 87.312,-82.614 87.312,-82.816 ; R15.2@86.509,-82.084 cw(c86.509,-82.743) 86.975,-82.277 cw(c87.441,-81.811) R15.2@86.782,-81.811 ; D4.1@87.398,-83.248 ccw(c87.032,-83.097) 87.312,-82.816 ; D4.1@87.744,-82.903 cw(c87.593,-82.536) 87.312,-82.816 ; D4.1@87.986,-83.49 87.312,-82.816
NetLED1_2: LED1.2 R1.1 | length 4.8
  Top Layer w0.254: LED1.2@41.887,-58.927 42.8,-58.927 ; LED1.2@42.318,-59.195 cw(c42.8,-59.494) 42.8,-58.927 ; LED1.2@42.318,-58.659 ccw(c42.8,-58.36) 42.8,-58.927 ; 43.056,-58.671 cw(c43.384,-58.998) R1.1@43.579,-58.578 ; R1.1@43.338,-58.673 ccw(c43.166,-58.75) 43.166,-58.561 ; R1.1@43.338,-58.45 cw(c43.166,-58.372) 43.166,-58.561 ; R1.1@43.472,-58.809 ccw(c43.22,-59.347) 42.8,-58.927 ; R1.1@43.637,-58.561 43.166,-58.561 ; 42.8,-58.927 43.166,-58.561
NetLED2_2: LED2.2 R2.1 | length 3.8
  Bottom Layer w0.5: LED2.2@19.462,-21.22 19.908,-21.22 20.603,-21.916 ; LED2.2@19.54,-21.597 cw(c19.776,-22.744) 20.603,-21.916 ; R2.1@21.451,-22.745 20.621,-21.916 20.603,-21.916
NetLED3_2: LED3.2 R3.1 | length 5.1
  Bottom Layer w0.254: R3.1@75.318,-23.239 75.375,-23.239 LED3.2@76.836,-21.778 ; R3.1@75.353,-22.93 ccw(c75.353,-22.133) 75.917,-22.697 ; R3.1@75.626,-23.203 cw(c76.146,-23.203) 75.778,-22.835 ; LED3.2@76.328,-21.778 cw(c75.101,-21.778) 75.968,-22.645 cw(c76.836,-23.513) LED3.2@76.836,-22.286
NetLED4_2: LED4.2 R4.1 | length 2.2
  Bottom Layer w0.254: R4.1@78.019,-76.992 78.548,-77.521 79.137,-77.521 LED4.2@79.767,-78.151